# EAGLE board LPC2101 Breakout (EAGLE 6.0)
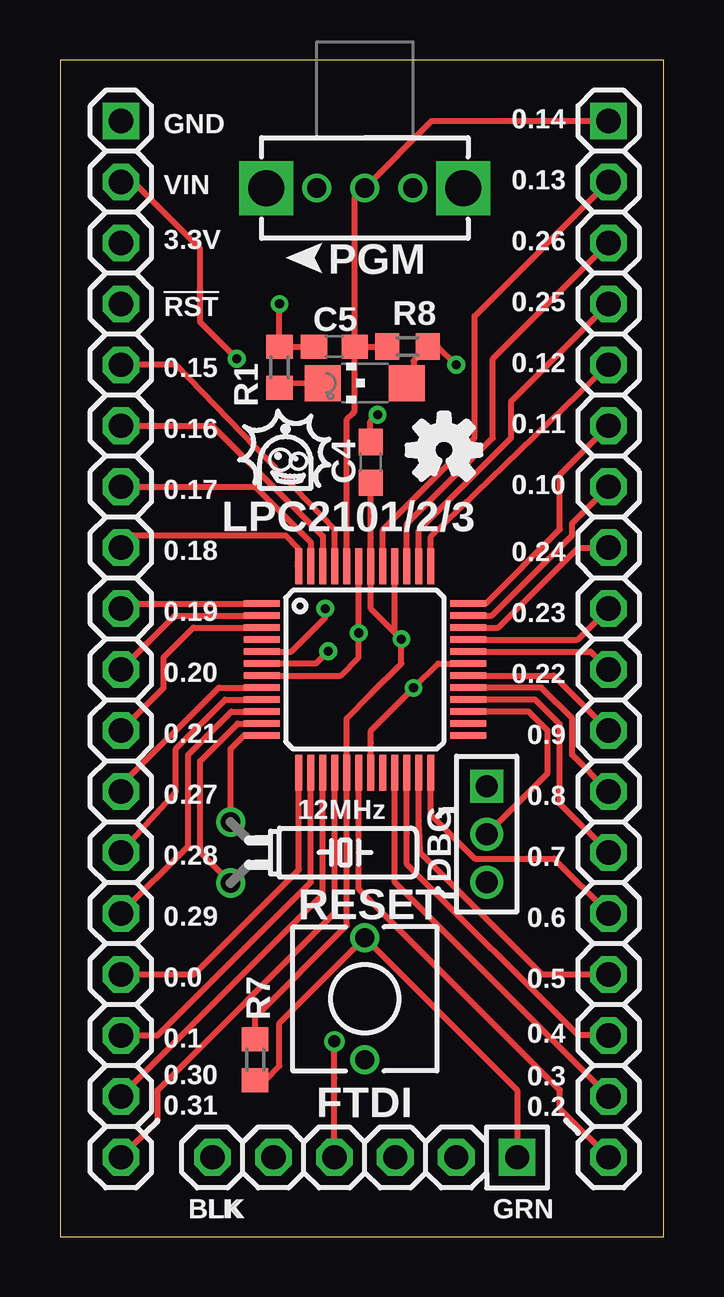
[diagram p0: board, top side]
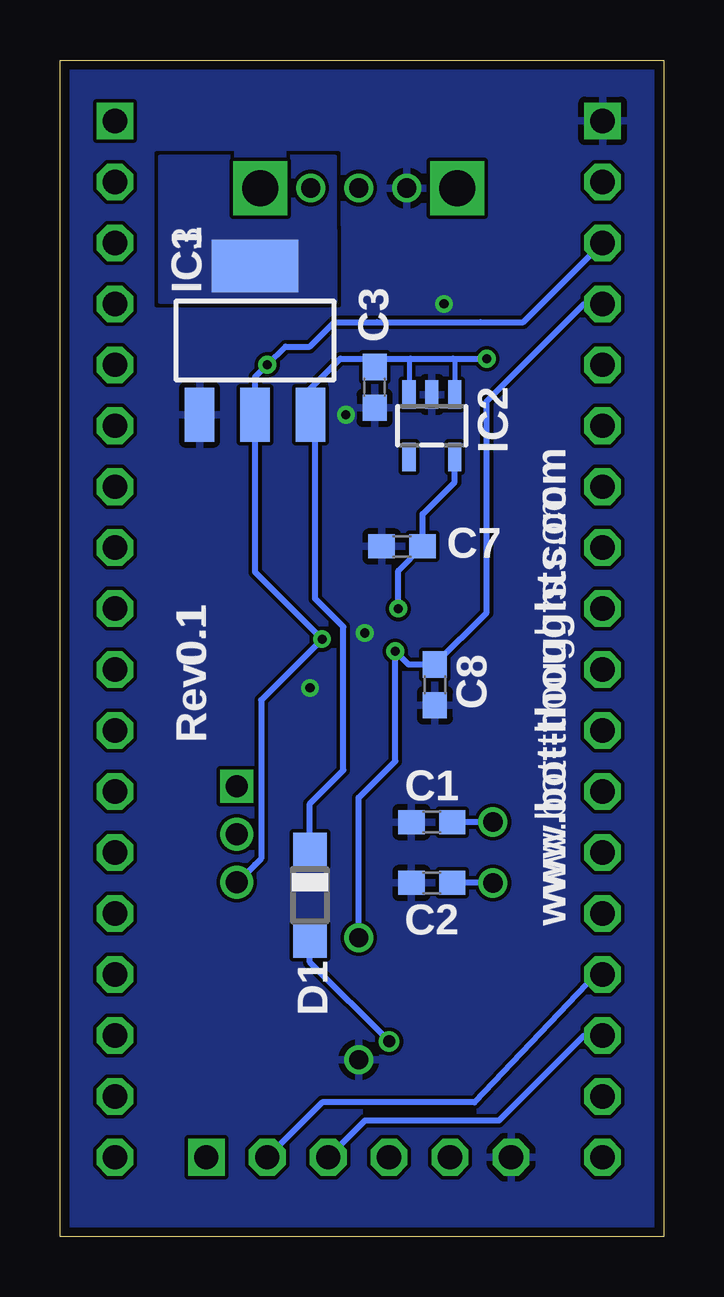
[diagram p1: board, bottom side, seen from below]

Size 25.15 x 49.02 mm. Coordinates in mm from the lower left corner, seen from the top.
Outline: 0,0 25.15,0 25.15,49.02 0,49.02 0,0
Copper layers (1*16): Top 0.0356mm / dielectric 1.5011mm / Bottom 0.0356mm
Design rules: minimum track width 6mil, minimum drill 13mil, track to track 6mil, track to pad 6mil, pad to pad 6mil, via to via 6mil, smd to smd 6mil, copper to edge 15mil, drill to drill 6mil, minimum pad ring 7mil, minimum via ring 7mil, stop-mask expansion 4mil, vias tented up to drill 0mil, thermal gap 10mil

## Footprints (pad centres in the part's own frame; a part is rotated, then mirrored left to right if it is on the bottom)
C0603 = smd 1.1 x 1: 1 -0.85,0; 2 0.85,0
SOD123 = smd 1.4 x 1.4: A 1.9,0; C -1.9,0
LQFP48 = smd 1.5 x 0.28: 1 -4.3,2.75; 2 -4.3,2.25; 3 -4.3,1.75; 4 -4.3,1.25; 5 -4.3,0.75; 6 -4.3,0.25; 7 -4.3,-0.25; 8 -4.3,-0.75; 9 -4.3,-1.25; 10 -4.3,-1.75; 11 -4.3,-2.25; 12 -4.3,-2.75; 25 4.3,-2.75; 26 4.3,-2.25; 27 4.3,-1.75; 28 4.3,-1.25; 29 4.3,-0.75; 30 4.3,-0.25; 31 4.3,0.25; 32 4.3,0.75; 33 4.3,1.25; 34 4.3,1.75; 35 4.3,2.25; 36 4.3,2.75 | smd 0.28 x 1.5: 13 -2.75,-4.3; 14 -2.25,-4.3; 15 -1.75,-4.3; 16 -1.25,-4.3; 17 -0.75,-4.3; 18 -0.25,-4.3; 19 0.25,-4.3; 20 0.75,-4.3; 21 1.25,-4.3; 22 1.75,-4.3; 23 2.25,-4.3; 24 2.75,-4.3; 37 2.75,4.3; 38 2.25,4.3; 39 1.75,4.3; 40 1.25,4.3; 41 0.75,4.3; 42 0.25,4.3; 43 -0.25,4.3; 44 -0.75,4.3; 45 -1.25,4.3; 46 -1.75,4.3; 47 -2.25,4.3; 48 -2.75,4.3
SOT23-5 = smd 0.55 x 1.2: 1 -0.95,-1.3; 2 0,-1.3; 3 0.95,-1.3; 4 0.95,1.3; 5 -0.95,1.3
SOT223 = smd 1.219 x 2.235: 1 -2.311,-3.099; 2 0,-3.099; 3 2.311,-3.099 | smd 3.6 x 2.2: 4 0,3.099
1X18-S = drill 1.016 square: 1 -21.59,0 | drill 1.016 octagon: 2 -19.05,0; 3 -16.51,0; 4 -13.97,0; 5 -11.43,0; 6 -8.89,0; 7 -6.35,0; 8 -3.81,0; 9 -1.27,0; 10 1.27,0; 11 3.81,0; 12 6.35,0; 13 8.89,0; 14 11.43,0; 15 13.97,0; 16 16.51,0; 17 19.05,0; 18 21.59,0
1X06-S = drill 1.016 square: 1 -6.35,0 | drill 1.016 octagon: 2 -3.81,0; 3 -1.27,0; 4 1.27,0; 5 3.81,0; 6 6.35,0
1X03M = drill 0.914 square: 1 -2,0 | drill 0.914: 2 0,0; 3 2,0
CHIPLED_1206 = smd 1.5 x 1.5: A 0,-1.75; C 0,1.75
TC26H = drill 0.813: 1 -1.27,0; 2 1.27,0
R0603 = smd 1 x 1.1: 1 -0.85,0; 2 0.85,0
6MMTACTILE = drill 0.8: P$1 -2.54,0; P$2 2.54,0
OS102011MA1Q = drill 1.5 square: G1 -4.1,0; G2 4.1,0 | drill 0.8: P$1 0,0; P$2 2,0; P$3 -2,0

## Placement (x,y rotation side)
C1  18pF  [C0603]  9.65,17.27 180 bottom
C2  18pF  [C0603]  9.65,14.73 180 bottom
C3  10uF  [C0603]  12.04,35.38 270 bottom
C4  0.1uF  [C0603]  12.95,32.26 90 top
C5  0.1uF  [C0603]  11.43,37.08 180 top
C7  0.1uF  [C0603]  10.9,28.75 180 bottom
C8  0.1uF  [C0603]  9.53,22.99 270 bottom
D1  [SOD123]  14.73,14.22 270 bottom
IC1  LPC2101/2/3  [LQFP48]  12.7,23.62 0 top
IC2  1.8V  [SOT23-5]  9.65,33.78 180 bottom
IC3  3.3V  [SOT223]  17.02,37.34 0 bottom
JP1  [1X18-S]  2.54,24.89 270 top
JP2  [1X18-S]  22.86,24.89 270 top
JP3  FTDI  [1X06-S]  12.7,3.3 180 top
JP4  DBG  [1X03M]  17.78,16.76 270 top
LED1  [CHIPLED_1206]  12.7,35.56 90 top
Q1  12MHz  [TC26H]  7.11,16 270 top
R1  330  [R0603]  9.14,36.22 270 top
R7  10k  [R0603]  8.13,7.37 90 top
R8  10k  [R0603]  14.48,37.08 0 top
S1  RESET  [6MMTACTILE]  12.7,9.91 90 top
S2  PGM  [OS102011MA1Q]  12.7,43.69 180 top

## Library data of the parts
C1 C2 = rcl; PARTNO: C1608C0G1H180J
C3 = rcl; PARTNO: C1608X5R0J106M_DK
C4 C5 C7 = rcl; PARTNO: CX0603MRX7R6BB104
C8 = rcl; BOM: INCLUDE; PARTNO: CX0603MRX7R6BB104
D1 = diode; BOM: INCLUDE; PARTNO: CGRM4001-G
IC1 = mes_arm; BOM: INCLUDE; PARTNO: LPC2101FBD48,151
IC2 = mes_regulators; BOM: INCLUDE; PARTNO: TLV70018DDCT
IC3 = SparkFun; BOM: EXCLUDE; PARTNO: SALVAGE
JP1-JP3 = pinhead-2; BOM: EXCLUDE
JP4 = pinhead-2; BOM: INCLUDE; PARTNO: 951103-8622-AR
LED1 = led; BOM: INCLUDE; PARTNO: LG N971-KN-1
Q1 = crystal; BOM: INCLUDE; OC_FARNELL: unknown; OC_NEWARK: unknown; PARTNO: CSA309-12.000MABJ-UB
R1 = rcl; BOM: INCLUDE; PARTNO: ERJ-3GEYJ331V
R7 R8 = rcl; BOM: INCLUDE; PARTNO: ERJ-3GEYJ103V
S1 = mes_electromech; BOM: EXCLUDE; PARTNO: SALVAGE
S2 = mes_electromech; BOM: INCLUDE; PARTNO: OS102011MA1QS1

## Nets
3.3V: C4.1 IC1.17 IC1.40 IC1.42 IC3.2 JP1.3 JP4.3 LED1.A R7.2 R8.2
5V: D1.A JP3.4
!RESET: C8.1 IC1.6 JP1.4 JP3.1 R7.1 S1.P$2
+1.8V: C7.1 IC1.5 IC2.5
DBGSEL: IC1.27 JP4.2
GND: C1.2 C2.2 C3.2 C4.2 C5.2 C7.2 C8.2 IC1.7 IC1.19 IC1.31 IC1.43 IC2.2 IC3.1 JP1.1 JP3.6 R1.1 S1.P$1 S2.P$2
HS1: IC3.4
N$2: LED1.C R1.2
N$6: C2.1 IC1.11 Q1.2
N$8: C1.1 IC1.12 Q1.1
P0.0: IC1.13 JP1.15 JP3.2
P0.1: IC1.14 JP1.16 JP3.3
P0.2: IC1.18 JP2.18
P0.3: IC1.21 JP2.17
P0.4: IC1.22 JP2.16
P0.5: IC1.23 JP2.15
P0.6: IC1.24 JP2.14
P0.7: IC1.28 JP2.13
P0.8: IC1.29 JP2.12
P0.9: IC1.30 JP2.11
P0.10: IC1.35 JP2.7
P0.11: IC1.36 JP2.6
P0.12: IC1.37 JP2.5
P0.13: IC1.41 JP2.2
P0.14: C5.1 IC1.44 JP2.1 R8.1 S2.P$1
P0.15: IC1.45 JP1.5
P0.16: IC1.46 JP1.6
P0.17: IC1.47 JP1.7
P0.18: IC1.48 JP1.8
P0.19: IC1.1 JP1.9
P0.20: IC1.2 JP1.10
P0.21: IC1.3 JP1.11
P0.22: IC1.32 JP2.10
P0.23: IC1.33 JP2.9
P0.24: IC1.34 JP2.8
P0.25: IC1.38 JP2.4
P0.26: IC1.39 JP2.3
P0.27: IC1.8 JP1.12
P0.28: IC1.9 JP1.13
P0.29: IC1.10 JP1.14
P0.30: IC1.15 JP1.17
P0.31: IC1.16 JP1.18
VBAT: IC1.4
VIN: C3.1 D1.C IC2.1 IC2.3 IC3.3 JP1.2

## Tracks (layer width: path | path; a pad name or v marks a point on that pad's centre or on a via)
3.3V  (via drill 0.38)
  Top 0.254: R7.2 8.13,9.14 11.95,12.97 IC1.17 11.95,21.6 12.95,22.61 14.22,23.88 v14.22,24.89 | C4.1 12.95,29.12 IC1.42 | v14.22,24.89 13.95,25.17 | 12.95,26.92 12.95,26.16 v14.22,24.89 | 12.95,26.92 IC1.42 | IC1.42 12.95,26.92 | 13.95,25.17 IC1.40 | v14.22,24.89 13.95,25.17 | LED1.A 14.73,35.81 14.73,36.49 R8.2 15.75,37.08 v16.51,36.32
  Bottom 0.254: JP1.3 5.84,38.1 7.62,38.1 11.94,38.1 13.72,38.1 14.73,37.08 15.75,37.08 v16.51,36.32 17.02,35.81 IC3.2 17.02,28.7 17.02,27.69 15.49,26.16 v14.22,24.89 16.76,22.35 16.76,15.75 17.02,15.49 17.75,14.76 JP4.3
5V  (via drill 0.5)
  Top 0.254: JP3.4 11.43,6.6 v11.43,8.13
  Bottom 0.254: D1.A 14.73,11.43 v11.43,8.13
!RESET  (via drill 0.38)
  Top 0.254: IC1.6 | R7.1 8.55,6.52 9.14,7.11 9.14,8.89 S1.P$2 19.05,6.1 JP3.1 | IC1.6 | IC1.6 10.66,23.87 v11.18,24.38
  Bottom 0.254: JP1.4 3.3,38.86 7.37,34.8 7.37,26 C8.1 10.63,23.84 v11.18,24.38 11.18,19.81 12.7,18.29 S1.P$2
+1.8V  (via drill 0.38)
  Top 0.254: IC1.5 9.64,24.37 11.05,25.78 v11.05,26.16
  Bottom 0.254: C7.1 9.79,28.72 | IC2.5 8.7,31.43 10.03,30.1 10.03,28.77 C7.1 | v11.05,26.16 11.05,27.75 C7.1
DBGSEL
  Top 0.254: IC1.27 19.53,21.87 20.32,21.08 20.32,19.3 JP4.2
GND  (via drill 0.38)
  Top 0.254: C4.2 12.93,33.96 v13.23,34.24 | IC1.31 15.75,23.87 v14.73,22.86 12.95,21.08 12.95,20.57 IC1.19 | IC1.7 11.69,23.37 12.45,24.13 v12.45,25.15 IC1.43 | C5.2 9.16,37.08 R1.1 v9.14,38.86
  pour Bottom (rank 2): 0,0 25.65,0 25.65,48.77 0,48.77
HS1
  pour Bottom (no thermals): 13.69,38.99 13.72,44.96 20.95,44.96 20.95,38.99
N$2
  Top 0.254: LED1.C 9.25,35.57 R1.2
N$6
  Top 0.254: IC1.11 7.4,21.37 5.84,19.81 5.84,16 Q1.2
  Bottom 0.254: Q1.2 C2.1
N$8
  Top 0.254: IC1.12 7.66,20.87 7.11,20.32 Q1.1
  Bottom 0.254: Q1.1 C1.1
P0.0
  Top 0.254: IC1.13 9.95,15.28 5.59,10.92 JP1.15
  Bottom 0.254: JP3.2 14.22,5.59 7.87,5.59 2.79,10.92 JP1.15
P0.1
  Top 0.254: IC1.14 10.45,14.77 4.06,8.38 JP1.16
  Bottom 0.254: JP3.3 12.45,4.83 6.86,4.83 3.3,8.38 JP1.16
P0.2
  Top 0.254: IC1.18 12.45,14.47 20.83,6.1 20.83,5.33 JP2.18
P0.3
  Top 0.254: IC1.21 13.95,14.75 JP2.17
P0.4
  Top 0.254: IC1.22 14.45,16.79 14.45,15.52 21.59,8.38 JP2.16
P0.5
  Top 0.254: IC1.23 14.95,17.31 14.95,17.05 14.99,16 20.07,10.92 JP2.15
P0.6
  Top 0.254: IC1.24 15.45,17.57 17.27,15.75 20.57,15.75 JP2.14
P0.7
  Top 0.254: IC1.28 19.79,22.37 20.83,21.34 20.83,18.03 JP2.13
P0.8
  Top 0.254: IC1.29 20.05,22.87 21.34,21.59 21.34,20.07 JP2.12
P0.9
  Top 0.254: IC1.30 20.57,23.37 JP2.11
P0.10
  Top 0.254: IC1.35 18,25.87 21.34,29.21 21.34,29.72 JP2.7
P0.11
  Top 0.254: IC1.36 17.74,26.37 20.83,29.46 20.83,31.75 JP2.6
P0.12
  Top 0.254: IC1.37 15.45,29.17 JP2.5
P0.13
  Top 0.254: IC1.41 13.45,29.45 13.46,29.46 17.27,33.27 17.27,38.35 JP2.2
P0.14
  Top 0.254: C5.1 R8.1 | IC1.44 11.95,34.05 12.19,34.29 12.28,34.38 C5.1 | JP2.1 15.49,46.48 S2.P$1 12.28,43.27 C5.1
P0.15
  Top 0.254: IC1.45 11.45,29.44 4.83,36.32 JP1.5
P0.16
  Top 0.254: IC1.46 10.95,29.18 6.35,33.78 JP1.6
P0.17
  Top 0.254: IC1.47 10.45,28.92 8.13,31.24 JP1.7
P0.18
  Top 0.254: 9.91,28.07 9.91,28.7 9.4,29.21 3.05,29.21 JP1.8 | 9.91,28.07 9.91,27.97 | IC1.48 9.91,27.92 9.91,28.07
P0.19
  Top 0.254: 2.75,26.37 JP1.9 2.75,26.37 | 2.75,26.37 IC1.1
P0.20
  Top 0.254: IC1.2 4.79,25.87 JP1.10
P0.21
  Top 0.254: IC1.3 5.56,25.37 4.32,24.13 4.32,22.86 JP1.11
P0.22
  Top 0.254: IC1.32 22.11,24.37 JP2.10
P0.23
  Top 0.254: IC1.33 21.57,24.87 JP2.9
P0.24
  Top 0.254: IC1.34 18.26,25.37 21.59,28.7 JP2.8
P0.25
  Top 0.254: IC1.38 14.95,29.43 18.8,33.27 18.8,34.8 JP2.4
P0.26
  Top 0.254: IC1.39 14.45,29.69 18.03,33.27 18.03,36.58 JP2.3
P0.27
  Top 0.254: IC1.8 6.62,22.87 2.54,18.8 JP1.12
P0.28
  Top 0.254: IC1.9 6.88,22.37 4.83,20.32 4.83,18.54 JP1.13
P0.29
  Top 0.254: IC1.10 7.14,21.87 5.33,20.07 5.33,16.26 JP1.14
P0.30
  Top 0.254: IC1.15 10.95,14.25 JP1.17
P0.31
  Top 0.254: IC1.16 11.45,13.48 4.06,6.1 4.06,4.83 JP1.18
VIN  (via drill 0.38)
  Top 0.254: v7.37,36.58 5.84,38.1 5.84,41.15 3.05,43.94 JP1.2
  Bottom 0.203: IC2.3 10.6,36.52 10.54,36.58 | IC2.1 8.7,36.52 8.76,36.58
  Bottom 0.254: 12.06,36.58 10.54,36.58 8.76,36.58 v7.37,36.58 | 12.06,36.58 13.46,36.58 14.73,35.31 14.73,34.27 IC3.3 14.52,34.05 14.52,26.58 13.34,25.4 13.34,19.43 14.73,18.03 D1.C | C3.1 12.04,36.55 12.06,36.58

## Text on the board
tNames: 0.14 | GND | 0.13 | VIN | 0.26 | 3.3V | 0.25 | !RST | 0.12 | 0.15 | 0.11 | 0.16 | 0.10 | 0.17 | 0.24 | 0.18 | 0.19 | 0.23 | 0.22 | 0.20 | 0.21 | 0.9 | 0.8 | 0.27 | 0.7 | 0.28 | 0.6 | 0.29 | 0.5 | 0.0 | 0.4 | 0.1 | 0.3 | 0.30 | 0.2 | 0.31 | BLK | GRN
bNames: Rev0.1 | www.bot-thoughts.com
_tsilk: 0.14 | GND | 0.13 | VIN | 0.26 | 3.3V | PGM | 0.25 | !RST | C5 | R8 | 0.12 | 0.15 | R1 | 0.11 | 0.16 | 0.10 | 0.17 | C4 | LPC2101/2/3 | 0.24 | 0.18 | 0.19 | 0.23 | 0.22 | 0.20 | 0.21 | 0.9 | 0.8 | 0.27 | 12MHz | 0.7 | 0.28 | DBG | 0.6 | 0.29 | RESET | 0.5 | 0.0 | R7 | 0.4 | 0.1 | 0.3 | 0.30 | 0.2 | 0.31 | FTDI | BLK | GRN
_bsilk: IC1 | C3 | IC2 | C7 | C8 | Rev0.1 | C1 | C2 | www.bot-thoughts.com | D1